# Altium PCB RCSS_B2B V3.0 20130320.PcbDoc (part 2 of 2)
Units mm, origin at the board's own origin, x right, y up, seen from the top; angles counter-clockwise.
Board outline 142.1 x 102.2 mm, 4 copper layers (Top Layer, Mid-Layer 1, Mid-Layer 2, Bottom Layer); 252 components, 153 nets, 735 pads, 222 vias.
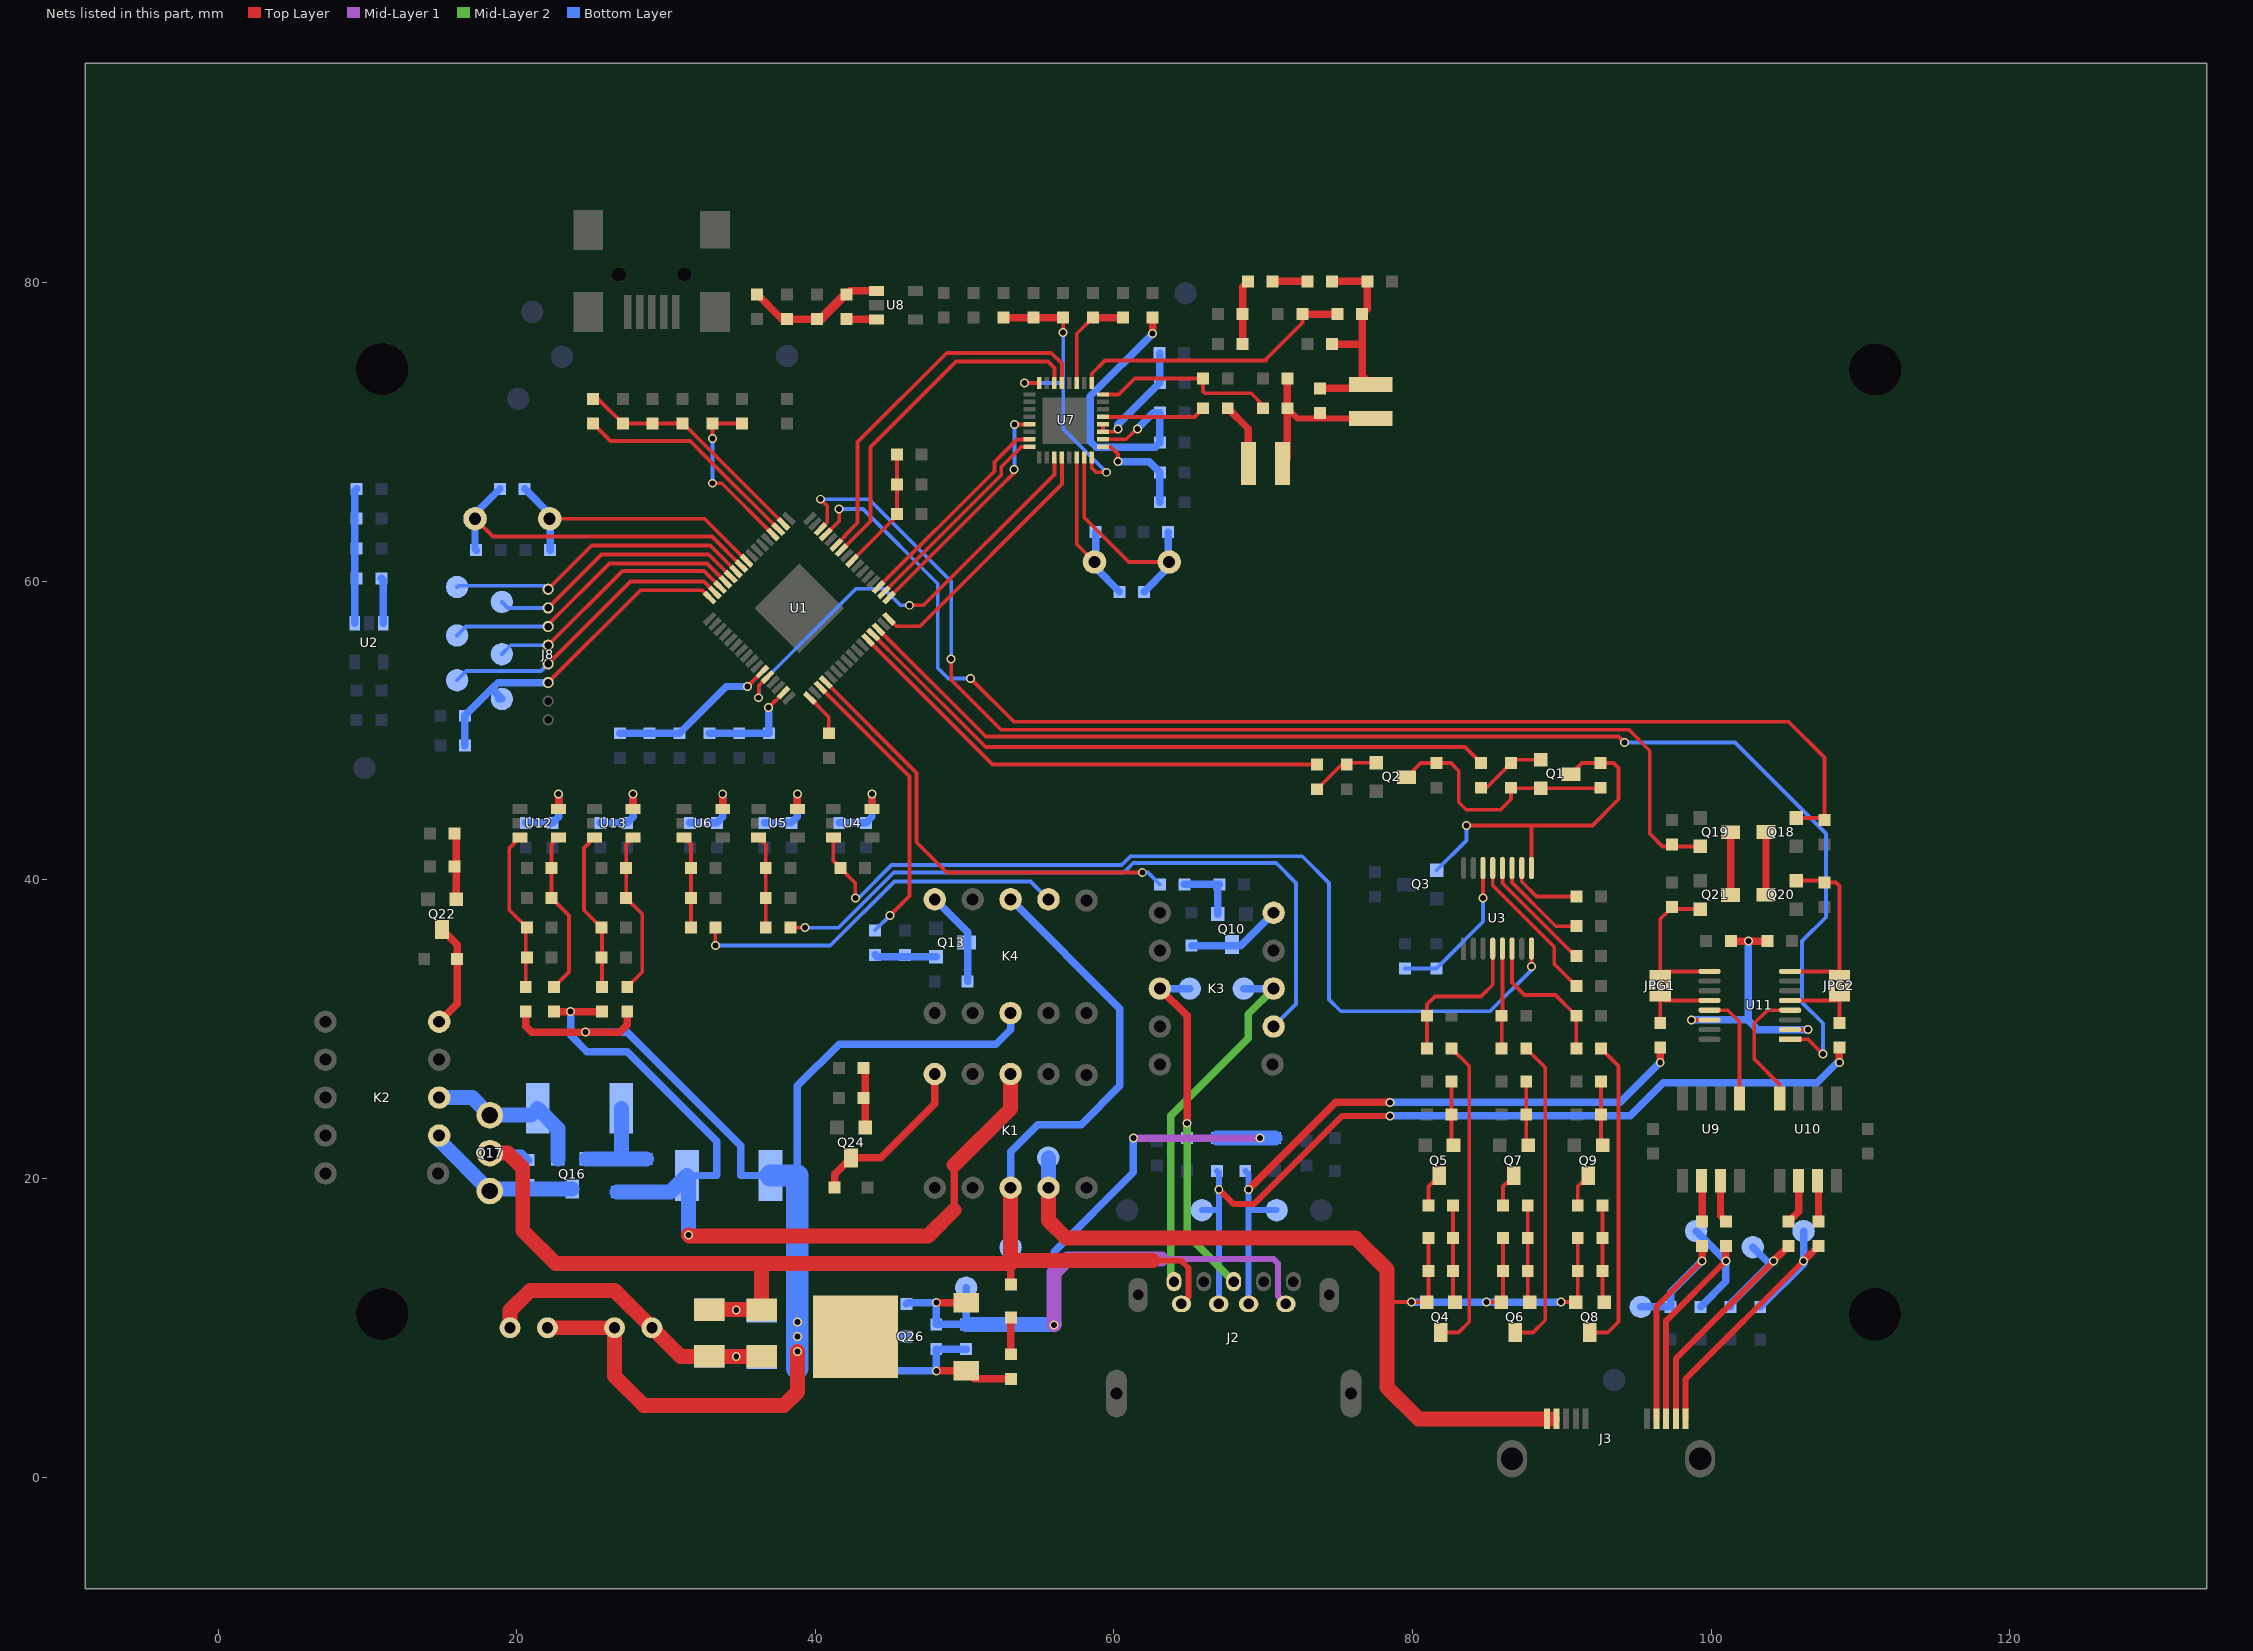
[diagram p4: the nets of this part, all layers, seen from the top]

## Via types
v1: diameter 0.6, hole 0.4, Top Layer to Bottom Layer, tented both sides, 221 vias
v2: diameter 0.8, hole 0.5, Top Layer to Bottom Layer, tented both sides, 1 vias

## Nets (pads, with @x,y where several pads share a name; then routed paths per layer and width w, separated by ;. In a path a pad name is that pad's centre, name@x,y a point inside that pad or via, vN(x,y) a via of type N, cw(c..) or ccw(c..) an arc to the next point about the centre after c; other vN are vias at no path point) (continued)
IRQ: U1.43 U7.13 | length 26.2
  Top Layer w0.254: U1.43@41.402,62.443 41.98,63.02 41.98,63.081 42.83,63.931 42.83,67.3 ; 42.83,66.3 42.83,67.3 ; U7.13@56.513,73.29 56.513,74.587 55.8,75.3 48.8,75.3 42.83,69.33 42.83,67.3
"LEV 1": R20.1 U1.28 | length 33.5
  Top Layer w0.254: U1.28@43.524,56.079 51.877,47.725 R20.1@73.6,47.725
"LEV 2": R17.1 U1.29 | length 46
  Top Layer w0.254: U1.29@43.877,56.432 45.555,54.755 ; 44.331,55.978 45.555,54.755 ; R17.1@84.6,47.825 83.525,48.9 51.41,48.9 45.555,54.755
MISO: U1.35 U7.23 | length 14.6
  Top Layer w0.254: U1.35@44.231,59.614 52,67.383 52,68 53.5,69.5 54.316,69.5 U7.23@54.335,69.519
MOD: U1.42 U7.14 | length 23.6
  Top Layer w0.254: U1.42@41.756,62.089 43.7,64.033 43.7,69 49.425,74.725 54.7,74.725 55.575,74.725 56.013,74.287 U7.14@56.013,73.29
MOSI: U1.34 U7.24 | length 14.1
  Top Layer w0.254: U1.34@44.584,59.261 51.945,66.621 ; 51.945,66.629 51.945,66.621 ; U7.24@54.335,69.019 53.819,69.019 52.457,67.657 52.457,67.133 51.945,66.621
NetC2_1: C2.1 R2.1 U1.52 | length 11.5
  Top Layer w0.254: v1(33.1,66.575) 33.735,66.575 U1.52@37.16,63.15 ; v1(33.1,69.575) R2.1@33.1,70.575 C2.1@35.1,70.575
  Bottom Layer w0.254: v1(33.1,66.575) v1(33.1,69.575)
NetC3_1: C3.1 R3.2 R4.1 R5.1 U1.50 | length 16.2
  Top Layer w0.254: R5.1@25.1,72.225 25.45,72.225 R4.1@27.1,70.575 C3.1@29.1,70.575 R3.2@31.1,70.575 31.149,70.575 U1.50@37.867,63.857
NetC5_2: C5.2 R52.1 R126.1 U12.4 | length 11.1
  Top Layer w0.254: R52.1@22.5,32.825 23.5,33.825 23.5,37.625 R126.1@22.325,38.8 C5.2@22.325,40.8 22.325,42.375 U12.4@22.795,42.845
NetC7_2: C7.2 R7.2 U1.57 XT1.1 | length 19.2
  Top Layer w0.254: XT1.1@22.2,64.2 32.574,64.2 U1.57@35.392,61.382
  Bottom Layer w0.5: R7.2@20.525,66.2 22.225,64.5 C7.2@22.225,62.1
NetC8_1: C8.1 R7.1 U1.58 XT1.2 | length 24
  Top Layer w0.254: XT1.2@17.2,64.2 18.4,63 30.067,63 33.067,63 U1.58@35.038,61.028
  Bottom Layer w0.5: C8.1@17.275,62.1 17.2,62.175 XT1.2@17.2,64.2 17.2,64.525 R7.1@18.875,66.2
NetC9_2: C9.2 C10.2 R8.2 R9.2 U2.1 | length 9.8
  Bottom Layer w0.5: U2.1@9.145,57.195 9.145,58.9 ; 9.145,58.195 9.145,58.9 ; R8.2@9.275,66.2 9.145,66.07 9.145,64.2 9.145,58.9
NetC13_1: C13.1 C16.1 R11.1 U1.11 | length 11.3
  Top Layer w0.254: v1(35.453,52.957) U1.11@36.453,53.957
  Bottom Layer w0.5: R11.1@26.9,49.825 C13.1@30.9,49.825 34.032,52.957 v1(35.453,52.957)
NetC14_1: C14.1 C15.1 R10.2 U1.15 | length 7.1
  Top Layer w0.254: v1(36.867,51.543) U1.15@37.867,52.543
  Bottom Layer w0.5: R10.2@32.9,49.825 C14.1@36.834,49.825 ; v1(36.867,51.543) 36.867,49.858 C14.1@36.9,49.825
NetC17_2: C17.2 U1.17 | length 2.9
  Top Layer w0.254: U1.17@39.635,52.19 40.9,50.924 C17.2@40.9,49.825
NetC18_1: C18.1 C19.1 R12.2 U1.40 | length 8.4
  Top Layer w0.254: U1.40@42.463,61.382 45.475,64.394 C18.1@45.475,64.5 C19.1@45.475,66.5 R12.2@45.475,68.5
NetC20_2: C20.2 R13.2 U3.14 | length 10.1
  Top Layer w0.254: v1(84.725,38.8) U3.14@84.725,40.8
  Bottom Layer w0.254: R13.2@79.5,34.075 C20.2@81.6,34.075 84.725,37.2 v1(84.725,38.8)
NetC21_2: C21.2 R122.1 R123.1 U13.4 | length 11.1
  Top Layer w0.254: R122.1@27.4,32.825 28.4,33.825 28.4,37.725 R123.1@27.325,38.8 27.325,42.375 U13.4@27.795,42.845
NetC22_1: C22.1 R72.2 U13.5 | length 4.9
  Top Layer w0.5: U13.5@27.795,44.755 v1(27.795,45.755)
  Bottom Layer w0.5: R72.2@25.6,43.825 C22.1@27.4,43.825 27.795,44.22 v1(27.795,45.755)
NetC23_1: C23.1 R120.1 R121.1 U13.3 | length 10.8
  Top Layer w0.254: U13.3@25.205,42.845 24.5,42.14 24.5,37.975 R120.1@25.675,36.8 25.7,36.775 R121.1@25.7,32.825
NetC24_2: C24.2 Q4.1 R27.1 R28.1 | length 6.5
  Top Layer w0.254: R28.1@82.725,18.2 C24.2@82.725,16 R27.1@82.725,13.8 82.725,11.843 Q4.1@82.852,11.716
NetC25_2: C25.2 Q6.1 R33.1 R34.1 | length 6.5
  Top Layer w0.254: R34.1@87.725,18.2 C25.2@87.725,16 R33.1@87.725,13.8 87.725,11.843 Q6.1@87.853,11.716
NetC26_2: C26.2 Q8.1 R39.1 R40.1 | length 6.5
  Top Layer w0.254: R40.1@92.725,18.2 C26.2@92.725,16 R39.1@92.725,13.8 92.725,11.843 Q8.1@92.853,11.716
NetC27_1: C27.1 R43.1 U4.5 | length 4.9
  Top Layer w0.5: U4.5@43.795,44.755 v1(43.795,45.755)
  Bottom Layer w0.5: R43.1@41.6,43.825 C27.1@43.4,43.825 43.795,44.22 v1(43.795,45.755)
NetC28_1: C28.1 U3.8 U4.3 | length 62.6
  Top Layer w0.254: U4.3@41.205,42.845 41.205,41.27 C28.1@41.675,40.8 42.675,39.8 v1(42.675,38.8) ; v1(87.975,34.2) U3.8@87.975,35.4
  Bottom Layer w0.254: v1(42.675,38.8) 42.907,38.8 45.107,41 60.523,41 61.111,41.587 71.2,41.587 72.613,41.587 74.4,39.8 74.4,32 75.2,31.2 85.2,31.2 87.975,33.975 v1(87.975,34.2)
NetC31_1: C31.1 R50.2 U5.5 | length 4.9
  Top Layer w0.5: U5.5@38.795,44.755 v1(38.795,45.755)
  Bottom Layer w0.5: R50.2@36.6,43.825 C31.1@38.4,43.825 38.795,44.22 v1(38.795,45.755)
NetC32_1: C32.1 R48.2 R49.2 U5.3 | length 6.2
  Top Layer w0.254: U5.3@36.205,42.845 36.675,42.375 R49.2@36.675,38.8 R48.2@36.675,36.8
NetC34_1: C34.1 R59.2 U6.5 | length 4.9
  Top Layer w0.5: U6.5@33.795,44.755 v1(33.795,45.755)
  Bottom Layer w0.5: R59.2@31.6,43.825 C34.1@33.4,43.825 33.795,44.22 v1(33.795,45.755)
NetC35_1: C35.1 R57.2 R58.2 U6.3 | length 6.2
  Top Layer w0.254: U6.3@31.205,42.845 31.675,42.375 R58.2@31.675,38.8 R57.2@31.675,36.8
NetC38_2: C38.2 R82.2 U7.31 XT2.1 | length 15.6
  Top Layer w0.254: U7.31@58.013,68.31 58.013,64.287 61,61.3 XT2.1@63.7,61.3
  Bottom Layer w0.5: R82.2@62.025,59.3 63.625,60.9 C38.2@63.625,63.3
NetC39_1: C39.1 R82.1 U7.30 XT2.2 | length 12.2
  Top Layer w0.254: U7.30@57.513,68.31 57.513,62.487 XT2.2@58.7,61.3
  Bottom Layer w0.5: C39.1@58.775,63.3 58.775,60.9 R82.1@60.375,59.3
NetC40_1: C40.1 C41.1 U7.3 U7.4 | length 7.5
  Top Layer w0.254: U7.4@59.265,70.519 U7.3@59.265,70.019 v1@60.065,70.019
  Bottom Layer w0.5: v1(60.265,70.219) 60.265,70.49 C41.1@63.075,73.3 C40.1@63.075,75.275
NetC42_1: C42.1 C43.1 R80.2 U7.2 | length 21.5
  Top Layer w0.254: U7.2@59.265,69.519 60.826,69.519 61.526,70.219 v1(61.565,70.219)
  Top Layer w0.5: v1(62.6,76.6) R80.2@62.6,77.675
  Bottom Layer w0.5: v1(61.565,70.219) 62.646,71.3 C42.1@63.075,71.3 C43.1@63.075,69.3 62.775,69 58.8,69 58.4,69.4 58.4,72.4 v1(62.6,76.6)
NetC44_1: C44.1 C45.1 U7.1 | length 6.8
  Top Layer w0.254: U7.1@59.265,69.019 59.781,69.019 60.265,68.535 v1(60.265,68.019)
  Bottom Layer w0.5: v1(60.265,68.019) 62.356,68.019 C44.1@63.075,67.3 C45.1@63.075,65.3
NetC48_2: C48.2 C49.2 U7.11 | length 6.8
  Top Layer w0.254: U7.11@57.513,73.29 57.513,76.588 C49.2@58.6,77.675
  Top Layer w0.5: C49.2@58.6,77.675 C48.2@60.6,77.675
NetC50_1: C50.1 L1.2 | length 4.3
  Top Layer w0.5: C50.1@67.625,71.6 69.015,70.21 L1.2@69.015,67.9
NetC50_2: C50.2 U7.5 | length 7
  Top Layer w0.254: U7.5@59.265,71.019 65.394,71.019 C50.2@65.975,71.6
NetC51_1: C51.1 C53.1 C54.2 L1.1 L2.2 | length 11.7
  Top Layer w0.4: C51.1@71.625,71.6 72.285,70.94 ; 72.285,70.915 L2.2@77.2,70.915
  Top Layer w0.5: L1.1@71.3,67.9 71.625,68.225 C51.1@71.625,71.6 C53.1@71.625,73.6
NetC51_2: C51.2 C52.1 U7.8 | length 12.6
  Top Layer w0.254: U7.8@59.265,72.519 60.319,72.519 61.4,73.6 C52.1@65.975,73.6 65.975,72.725 66.1,72.6 69.2,72.6 69.975,71.825 C51.2@69.975,71.6
NetC54_1: C54.1 C55.1 C56.1 L2.1 R84.2 R85.1 | length 15
  Top Layer w0.5: C54.1@73.8,72.925 76.925,72.925 L2.1@77.2,73.2 76.625,73.775 C56.1@76.625,77.9 76.975,78.25 R85.1@76.975,80.1 R84.2@74.625,80.1 ; C55.1@74.625,75.9 76.525,75.9
NetC56_2: C56.2 C57.1 U7.9 | length 19.1
  Top Layer w0.254: U7.9@58.513,73.29 58.513,73.913 59.4,74.8 70.2,74.8 70.2,74.9 72.625,77.325 C57.1@72.625,77.9
  Top Layer w0.5: C57.1@72.625,77.9 C56.2@74.975,77.9
NetC58_1: C58.1 C59.1 R83.2 | length 4.3
  Top Layer w0.5: R83.2@68.625,75.9 C59.1@68.625,77.9 68.625,79.75 C58.1@68.975,80.1
NetC58_2: C58.2 R84.1 | length 2.3
  Top Layer w0.5: C58.2@70.625,80.1 R84.1@72.975,80.1
NetC60_2: C60.2 C61.2 R86.2 R87.2 U8.1 | length 16.3
  Top Layer w0.254: C60.2@38.1,77.575 C61.2@40.1,77.575 41.98,79.455 U8.1@44.105,79.455
  Top Layer w0.5: R86.2@36.1,79.225 37.75,77.575 C60.2@38.1,77.575 40.45,77.575 42.33,79.455 U8.1@44.105,79.455
NetC66_2: C66.2 R92.1 U11.2 U11.14 | length 18.2
  Top Layer w0.254: v1(98.7,30.625) U11.14@99.9,30.625 ; U11.2@105.3,29.975 v1(106.5,29.975)
  Top Layer w0.5: C66.2@101.325,35.9 v1(102.5,35.9) R92.1@103.775,35.9
  Bottom Layer w0.5: v1(98.7,30.625) 102.475,30.625 102.5,30.6 ; v1(102.5,35.9) 102.5,30.6 ; v1(106.5,29.975) 103.125,29.975 102.5,30.6
NetC67_2: C67.2 D3.1 Q26.1 R93.1 R94.1 | length 12.8
  Top Layer w0.5: v1(48.1,7.115) Q26.1@50.1,7.115 50.64,6.575 R93.1@53.1,6.575
  Bottom Layer w0.5: D3.1@44.1,7.3 44.285,7.115 v1(48.1,7.115) R94.1@48.1,8.575 C67.2@50.1,8.575
NetC69_1: C69.1 R70.2 U12.5 | length 4.9
  Top Layer w0.5: U12.5@22.795,44.755 v1(22.795,45.755)
  Bottom Layer w0.5: R70.2@20.6,43.825 C69.1@22.4,43.825 22.795,44.22 v1(22.795,45.755)
NetC70_1: C70.1 R61.1 R113.1 U12.3 | length 10.8
  Top Layer w0.254: U12.3@20.205,42.845 19.5,42.14 19.5,37.975 R61.1@20.675,36.8 20.6,36.725 R113.1@20.6,32.825
NetD1_1: D1.1 D2.2 R95.2 R96.2 R97.2 R98.2 | length 23.9
  Top Layer w1: D1.1@19.55,10 19.55,11.15 20.9,12.5 26.55,12.5 D2.2@29.05,10 30.965,8.085 R98.2@32.9,8.085 R96.2@36.4,8.085
  Bottom Layer w1: R97.2@32.9,8.085 36.3,8.085 R95.2@36.4,7.985
  other v1: 34.7,8.085
NetD3_2: D3.2 D4.2 | length 2
  Bottom Layer w0.5: D3.2@44.1,9.5 46,9.5 D4.2@46.1,9.4
NetD5_1: D5.1 R93.2 | length 2.5
  Top Layer w0.5: R93.2@53.1,8.225 D5.1@53.1,10.7
NetD6_1: D6.1 D7.1 K1.3 R52.2 R121.2 R125.1 | length 60.1
  Top Layer w0.5: R52.2@22.5,31.175 v1(23.6,31.175) R121.2@25.7,31.175 ; 49.3,17.9 49.3,20.9
  Top Layer w1: v1(31.5,16.2) 31.553,16.147 47.547,16.147 49.3,17.9 ; 49.3,20.9 53.08,24.68 K1.3@53.08,27
  Bottom Layer w0.5: v1(23.6,31.175) 23.6,29.6 24.7,28.5 27.4,28.5 33.4,22.5 33.4,20.2 R125.1@31.4,20.2
  Bottom Layer w1: D7.1@26.7,19.1 D6.1@28.7,19.1 30.3,19.1 R125.1@31.4,20.2 ; v1(31.5,16.2) R125.1@31.5,20.1
NetD6_2: D6.2 D7.2 Q16.2 R62.2 | length 7.6
  Bottom Layer w1: Q16.2@24.652,21.316 D7.2@26.716,21.316 ; D7.2@26.7,21.3 D7.2@26.716,21.316 ; R62.2@27,24.7 27,21.6 D7.2@26.716,21.316 ; D6.2@28.7,21.3 28.684,21.316 D7.2@26.716,21.316
NetD8_2: D8.2 K1.1 Q24.3 | length 11.6
  Top Layer w0.5: D8.2@41.287,19.384 41.287,20.284 Q24.3@42.387,21.384 44.384,21.384 48,25 K1.1@48,27
NetD17_2: D17.2 K3.1 Q10.3 | length 6.4
  Bottom Layer w0.5: D17.2@65.2,35.6 68.5,35.6 K3.1@70.7,37.8
NetD18_2: D18.2 K4.1 Q13.3 | length 6.4
  Bottom Layer w0.5: K4.1@48,38.7 50.2,36.5 D18.2@50.2,33.2
NetD19_2: D19.2 K2.1 Q22.3 | length 7.1
  Top Layer w0.5: K2.1@14.8,30.5 16,31.7 D19.2@16,34.7 16,35.671 Q22.3@14.987,36.684
NetJPG1_2: JPG1.2 R105.2 U11.12 | length 5.2
  Top Layer w0.254: R105.2@96.6,30.425 JPG1.2@96.6,32.195 96.87,31.925 U11.12@99.9,31.925
NetJPG2_1: JPG2.1 R106.2 U11.5 | length 5.2
  Top Layer w0.254: U11.5@105.3,31.925 108.33,31.925 JPG2.1@108.6,32.195 R106.2@108.6,30.425
NetK2_3: K2.3 Q16.1 Q17.2 R62.1 | length 10.6
  Bottom Layer w1: K2.3@14.8,25.42 17.017,25.42 Q17.2@18.197,24.24 R62.1@20.94,24.24 ; R62.1@21.4,24.7 22.747,23.353 Q16.1@22.747,21.316
NetK2_4: K2.4 Q16.3 Q17.1 R63.2 | length 10.7
  Bottom Layer w1: K2.4@14.8,22.88 14.8,22.558 Q17.1@18.198,19.16 18.322,19.284 Q16.3@23.713,19.284
NetK3_4: K3.4 R48.1 | length 46.5
  Top Layer w0.254: R48.1@38.325,36.8 v1(39.3,36.8)
  Bottom Layer w0.254: v1(39.3,36.8) 41.553,36.8 45.253,40.5 60.67,40.5 61.3,41.13 70.87,41.13 72.2,39.8 72.2,31.68 K3.4@70.7,30.18
NetK4_4: K4.4 R57.1 | length 25.8
  Top Layer w0.254: v1(33.3,35.6) R57.1@33.3,36.775
  Bottom Layer w0.254: v1(33.3,35.6) 41,35.6 45.3,39.9 54.42,39.9 K4.4@55.62,38.7
NetQ1_1: Q1.1 R17.2 R18.2 | length 4.8
  Top Layer w0.254: R17.2@84.6,46.175 84.95,46.175 86.827,48.053 Q1.1@88.584,48.053
NetQ1_2: Q1.2 Q2.3 R18.1 R19.2 R22.1 | length 16.9
  Top Layer w0.254: Q2.3@79.616,46.887 80.554,47.825 R22.1@81.6,47.825 82.575,47.825 83.1,47.3 83.1,45.2 83.6,44.7 85.9,44.7 86.6,45.4 R18.1@86.6,46.175 ; R18.1@86.627,46.148 Q1.2@88.584,46.148 92.573,46.148 R19.2@92.6,46.175
NetQ1_3: Q1.3 Q3.1 R19.1 U3.9 | length 23.2
  Top Layer w0.254: v1(83.616,43.653) 92.053,43.653 93.8,45.4 93.8,47.5 93.475,47.825 R19.1@92.6,47.825 91.354,47.825 Q1.3@90.616,47.087 ; U3.9@87.975,40.8 87.975,43.577
  Bottom Layer w0.254: Q3.1@81.616,40.652 83.616,42.653 v1(83.616,43.653)
NetQ2_1: Q2.1 R20.2 R21.2 | length 4.7
  Top Layer w0.254: R20.2@73.6,46.075 75.378,47.853 Q2.1@77.584,47.853
NetQ4_3: Q4.3 R26.1 | length 21
  Top Layer w0.254: Q4.3@81.887,9.684 83.084,9.684 83.8,10.4 83.8,27.525 R26.1@82.625,28.7
NetQ5_1: Q5.1 R29.2 R30.2 | length 4.3
  Top Layer w0.254: R29.2@82.625,26.5 R30.2@82.625,24.3 82.625,22.343 Q5.1@82.752,22.216
NetQ5_3: Q5.3 R28.2 | length 2.3
  Top Layer w0.254: R28.2@81.075,18.2 81.075,19.472 Q5.3@81.787,20.184
NetQ6_3: Q6.3 R32.1 | length 21.1
  Top Layer w0.254: Q6.3@86.887,9.684 88.084,9.684 88.9,10.5 88.9,27.425 R32.1@87.625,28.7
NetQ7_1: Q7.1 R35.2 R36.2 | length 4.3
  Top Layer w0.254: R35.2@87.625,26.5 R36.2@87.625,24.3 87.625,22.343 Q7.1@87.752,22.216
NetQ7_3: Q7.3 R34.2 | length 2.3
  Top Layer w0.254: R34.2@86.075,18.2 86.075,19.472 Q7.3@86.787,20.184
NetQ8_3: Q8.3 R38.1 | length 21
  Top Layer w0.254: Q8.3@91.887,9.684 93.084,9.684 93.8,10.4 93.8,27.525 R38.1@92.625,28.7
NetQ9_1: Q9.1 R41.2 R42.2 | length 4.3
  Top Layer w0.254: R41.2@92.625,26.5 92.625,22.343 Q9.1@92.753,22.216
NetQ9_3: Q9.3 R40.2 | length 2.3
  Top Layer w0.254: R40.2@91.075,18.2 91.075,19.472 Q9.3@91.787,20.184
NetQ10_1: Q10.1 R44.2 R45.1 | length 4.4
  Bottom Layer w0.5: R44.2@64.725,39.7 R45.1@67.075,39.7 66.947,39.573 Q10.1@66.947,37.716
NetQ13_1: Q13.1 R53.2 R54.1 | length 4.1
  Bottom Layer w0.5: R53.2@44,34.975 44.127,34.847 Q13.1@48.084,34.847
NetQ18_3: Q18.3 Q20.3 | length 4.2
  Top Layer w0.5: Q20.3@103.684,39.013 Q18.3@103.684,43.213
NetQ19_3: Q19.3 Q21.3 | length 4.2
  Top Layer w0.5: Q21.3@101.316,38.987 Q19.3@101.316,43.187
NetQ22_1: Q22.1 R103.1 R104.2 | length 4.4
  Top Layer w0.5: R103.1@15.825,43.1 15.953,42.973 Q22.1@15.953,38.716
NetQ24_1: Q24.1 R73.1 R74.2 | length 4
  Top Layer w0.5: R73.1@43.225,27.4 43.353,27.273 Q24.1@43.353,23.416
NetR9_1: R9.1 U2.3 | length 3.1
  Bottom Layer w0.5: R9.1@10.925,60.2 11.055,60.07 U2.3@11.055,57.195
NetR14_1: R14.1 U3.13 | length 10.2
  Top Layer w0.254: U3.13@85.375,40.8 85.375,39.625 89.5,35.5 89.5,34.375 R14.1@90.975,32.9
NetR15_1: R15.1 U3.12 | length 8
  Top Layer w0.254: U3.12@86.025,40.8 86.025,39.775 90.9,34.9 R15.1@90.975,34.9
NetR16_1: R16.1 U3.11 | length 6.5
  Top Layer w0.254: U3.11@86.675,40.8 86.675,39.825 89.6,36.9 R16.1@90.975,36.9
NetR23_1: R23.1 U3.10 | length 5
  Top Layer w0.254: U3.10@87.325,40.8 87.325,39.875 88.3,38.9 R23.1@90.975,38.9
NetR25_2: R25.2 R26.2 U3.4 | length 10.3
  Top Layer w0.254: R26.2@80.975,28.7 R25.2@80.975,30.9 80.975,31.675 81.5,32.2 84.6,32.2 85.375,32.975 U3.4@85.375,35.4
NetR31_2: R31.2 R32.2 U3.5 | length 6.7
  Top Layer w0.254: R32.2@85.975,28.7 R31.2@85.975,30.9 86.025,30.95 U3.5@86.025,35.4
NetR37_2: R37.2 R38.2 U3.6 | length 9.7
  Top Layer w0.254: U3.6@86.675,35.4 86.675,33.125 87.5,32.3 89.575,32.3 R37.2@90.975,30.9 R38.2@90.975,28.7
NetR87_1: R87.1 U8.3 | length 2
  Top Layer w0.5: R87.1@42.1,77.575 U8.3@44.075,77.575
NetR88_1: R88.1 U9.6 | length 2.7
  Top Layer w0.5: U9.6@99.365,19.85 99.4,19.815 R88.1@99.4,17.125
NetR89_1: R89.1 U9.7 | length 2.9
  Top Layer w0.5: U9.7@100.635,19.85 100.635,17.49 R89.1@101,17.125
NetR90_1: R90.1 U10.6 | length 3
  Top Layer w0.5: R90.1@105.2,17.125 105.865,17.79 U10.6@105.865,19.85
NetR91_1: R91.1 U10.7 | length 2.8
  Top Layer w0.5: U10.7@107.135,19.85 107.2,19.785 R91.1@107.2,17.125
NetU1_12: U1.12 U7.27 | length 30.2
  Top Layer w0.254: v1(36.206,52.204) 36.206,53.004 U1.12@36.806,53.604 ; v1(46.3,58.4) 47.247,58.4 56.013,67.167 U7.27@56.013,68.31
  Bottom Layer w0.254: v1(36.206,52.204) 36.206,53.004 42.702,59.5 44.6,59.5 45.7,58.4 v1(46.3,58.4)
NetU9_1: U9.1 U11.13 | length 7.5
  Top Layer w0.254: U11.13@99.9,31.275 101.125,31.275 101.905,30.495 U9.1@101.905,25.35
NetU10_4: U10.4 U11.4 | length 8.5
  Top Layer w0.254: U10.4@104.595,25.35 104.595,26.305 102.9,28 102.9,30.4 103.775,31.275 U11.4@105.3,31.275
"NFC EN": U1.32 U7.28 | length 17.5
  Top Layer w0.254: U1.32@44.938,57.493 45.431,57 47,57 56.513,66.513 U7.28@56.513,68.31
"PACK C+": J2.9 K3.3 TP26.1 | length 24.6
  Mid-Layer 2 w0.5: J2.9@64.025,13.095 63.8,13.32 63.8,24.2 69,29.4 69,31.02 K3.3@70.7,32.72
  Bottom Layer w0.5: TP26.1@68.7,32.72 K3.3@70.7,32.72
"PACK C-": D12.2 J2.7 K3.8 TP27.1 | length 24.7
  Top Layer w0.5: K3.8@63.08,32.72 64.9,30.9 v1(64.9,23.7)
  Mid-Layer 2 w0.5: v1(64.9,23.7) 64.9,16.22 J2.7@68.025,13.095
  Bottom Layer w0.5: K3.8@63.08,32.72 TP27.1@65.08,32.72 ; D12.2@64.9,22.7 v1(64.9,23.7)
"PACK D+": D5.2 J2.1 K1.8 K4.3 Q17.3 R63.1 R95.1 R96.1 R97.1 R98.1 TP17.1 | length 106.2
  Top Layer w0.4: 62.6,14.5 64.5,14.5 65,14 65,12.07 J2.1@64.525,11.595
  Top Layer w0.5: 53.08,14.3 53.1,14.28 D5.2@53.1,12.9
  Top Layer w1: Q17.3@18.197,21.7 19.4,21.7 20.4,20.7 20.4,16.5 22.6,14.3 29.2,14.3 ; 29.815,14.3 29.2,14.3 ; R98.1@32.9,11.215 R96.1@36.4,11.215 36.4,14.2 ; K1.8@53.08,19.38 53.08,14.3 ; 62.6,14.5 53.28,14.5 53.08,14.3 ; 29.2,14.3 53.08,14.3
  Bottom Layer w0.5: Q17.3@18.197,21.7 20.325,21.7 R63.1@20.8,21.225 ; K1.8@53.08,19.38 53.08,21.78 54.9,23.6 57.8,23.6 60.4,26.2 60.4,31.38 K4.3@53.08,38.7
  Bottom Layer w1: R97.1@32.9,11.215 36.3,11.215 R95.1@36.4,11.115 ; TP17.1@53.08,15.38 K1.8@53.08,19.38
  other v1: 34.7,11.2
"PACK D-": D1.2 D2.1 K4.8 Q26.3 R113.2 R122.2 R125.2 | length 89.1
  Top Layer w0.5: R113.2@20.6,31.175 20.6,30.2 21,29.8 v1(24.6,29.8) 26.9,29.8 27.4,30.3 R122.2@27.4,31.175
  Top Layer w1: D1.2@22.05,10 D2.1@26.55,10 26.55,6.75 28.5,4.8 37.9,4.8 38.8,5.7 v1(38.8,8.4)
  Top Layer w1.5: Q26.3@41.7,9.4 Q26.3@42.7,9.4
  Bottom Layer w0.5: v1(24.6,29.8) 27.4,29.8 35,22.2 35,20.2 R125.2@37,20.2 ; 38.8,20.2 38.8,26.2 41.6,29 52.1,29 53.08,29.98 K4.8@53.08,31.08
  Bottom Layer w1.5: R125.2@37,20.2 38.8,20.2 v1(38.8,9.4) 38.8,7.3
  other v1: 38.8,10.4
"PACK D- IN": C67.1 D4.1 D9.2 D10.2 D11.2 J2.4 Q26.2 R94.2 TP18.1 | length 64.8
  Top Layer w0.5: v1(48.1,11.685) Q26.2@50.1,11.685
  Mid-Layer 1 w0.4: 63.2,14.6 70.7,14.6 71,14.3 71,12.12 J2.4@71.525,11.595
  Mid-Layer 1 w0.5: v1(61.3,22.7) v1(69.8,22.7)
  Mid-Layer 1 w1: v1(56,10.2) 56,13.7 56.9,14.6 63.2,14.6
  Bottom Layer w0.5: D4.1@46.1,11.6 46.185,11.685 v1(48.1,11.685) R94.2@48.1,10.225 C67.1@50.1,10.225 TP18.1@50.1,12.685 ; v1(56,10.2) 56,15.1 61.3,20.4 v1(61.3,22.7)
  Bottom Layer w1: C67.1@50.1,10.225 v1@55.975,10.225 ; D9.2@66.9,22.7 D10.2@68.8,22.7 v1(69.8,22.7) D11.2@70.8,22.7
PUR: R5.2 U1.51 | length 15.3
  Top Layer w0.254: R5.2@25.1,70.575 26.275,69.4 31.617,69.4 32.708,68.308 U1.51@37.513,63.503
RST: C6.2 J8.6 R6.2 TP10.1 U1.64 | length 23.3
  Top Layer w0.254: J8.6@22.1,53.225 28.275,59.4 32.424,59.4 U1.64@32.917,58.907
  Bottom Layer w0.5: R6.2@16.525,49 C6.2@16.525,51 18.363,52.837 ; TP10.1@18.787,52.125 TP10.1@19,52.125 18.363,52.762 18.363,52.837 ; J8.6@22.1,53.225 18.75,53.225 18.363,52.837
RX: Q19.2 R67.2 U1.46 | length 78.1
  Top Layer w0.254: U1.46@40.342,63.503 40.8,63.962 40.8,65.045 v1(40.342,65.503) ; v1(49.1,54.8) 49.1,53.4 52.443,50.057 94.5,50.057 95.9,48.657 95.9,43.1 96.752,42.248 Q19.2@99.284,42.248
  Bottom Layer w0.254: v1(40.342,65.503) 43.597,65.503 49.1,60 v1(49.1,54.8)
RX1: D10.1 J2.3 R105.1 TP20.1 | length 42.9
  Top Layer w0.5: v1(69.025,19.275) 74.85,25.1 v1(78.5,25.1) ; v1(96.6,27.775) R105.1@96.6,28.775
  Bottom Layer w0.4: D10.1@68.8,20.5 69.025,20.275 v1(69.025,19.275) J2.3@69.025,11.595 ; 69.05,17.875 TP20.1@70.9,17.875
  Bottom Layer w0.5: v1(78.5,25.1) 93.925,25.1 v1(96.6,27.775)
RX+: D14.1 J3.7 R88.2 TP13.1 | length 18.8
  Top Layer w0.4: J3.7@96.35,3.9 96.35,11.425 v1(99.4,14.475)
  Top Layer w0.5: v1(99.4,14.475) R88.2@99.4,15.475
  Bottom Layer w0.5: TP13.1@95.3,11.4 D14.1@97.3,11.4 97.3,12.375 v1(99.4,14.475)
RX-: D13.1 J3.8 R89.2 TP15.1 | length 19.8
  Top Layer w0.4: J3.8@97,3.9 97,10.475 v1(101,14.475)
  Top Layer w0.5: v1(101,14.475) R89.2@101,15.475
  Bottom Layer w0.5: TP15.1@99,16.475 v1(101,14.475) 101,13.1 D13.1@99.3,11.4
RXD: JPG1.1 Q21.2 R71.2 U11.9 | length 10.3
  Top Layer w0.254: Q21.2@99.284,38.048 97.527,38.048 R71.2@97.4,38.175 96.6,37.375 JPG1.1@96.6,33.605 96.87,33.875 U11.9@99.9,33.875
SS: U1.33 U7.21 | length 16.4
  Top Layer w0.254: U1.33@44.938,58.907 52.315,66.284 ; 52.531,66.5 52.315,66.284 ; v1(53.3,67.5) 53.3,67.269 52.315,66.284 ; v1(53.335,70.519) U7.21@54.335,70.519
  Bottom Layer w0.254: v1(53.3,67.5) 53.335,67.535 v1(53.335,70.519)
TCK: J8.5 TP9.1 U1.63 | length 20.3
  Top Layer w0.254: J8.5@22.1,54.475 27.625,60 32.531,60 U1.63@33.271,59.261
  Bottom Layer w0.254: TP9.1@16,53.375 16.625,54 21.625,54 J8.5@22.1,54.475
TDI: J8.3 TP7.1 U1.61 | length 20.6
  Top Layer w0.254: J8.3@22.1,56.975 22.1,57.1 26.2,61.2 32.746,61.2 U1.61@33.978,59.968
  Bottom Layer w0.254: TP7.1@16,56.375 16.6,56.975 J8.3@22.1,56.975
TDO: J8.2 TP6.1 U1.60 | length 17.6
  Top Layer w0.254: J8.2@22.1,58.225 25.675,61.8 32.853,61.8 U1.60@34.331,60.321
  Bottom Layer w0.254: TP6.1@19,58.625 19.4,58.225 J8.2@22.1,58.225
TEST: J8.1 TP5.1 U1.59 | length 20.7
  Top Layer w0.254: J8.1@22.1,59.475 25.025,62.4 32.96,62.4 U1.59@34.685,60.675
  Bottom Layer w0.254: TP5.1@16,59.625 16.08,59.705 21.87,59.705 J8.1@22.1,59.475
TMS: J8.4 TP8.1 U1.62 | length 17.4
  Top Layer w0.254: J8.4@22.1,55.725 27.075,60.7 32.538,60.7 U1.62@33.624,59.614
  Bottom Layer w0.254: TP8.1@19,55.125 19.6,55.725 J8.4@22.1,55.725
TX: Q18.2 R68.2 U1.45 | length 84.4
  Top Layer w0.254: U1.45@40.695,63.15 41.595,64.05 v1(41.595,64.85) ; v1(50.4,53.5) 53.3,50.6 105.2,50.6 107.6,48.2 R68.2@107.6,44.025 107.473,44.153 Q18.2@105.716,44.153
  Bottom Layer w0.254: v1(41.595,64.85) 43.187,64.85 48.2,59.836 48.2,54.2 48.9,53.5 v1(50.4,53.5)
TX1: D9.1 J2.2 R106.1 TP19.1 | length 56.9
  Top Layer w0.4: v1(67.025,19.275) 68,18.3 69.4,18.3 75.3,24.2 v1(78.5,24.2)
  Top Layer w0.5: v1(108.6,27.775) R106.1@108.6,28.775
  Bottom Layer w0.4: TP19.1@65.9,17.875 66.95,17.875 ; D9.1@66.9,20.5 67.025,20.375 v1(67.025,19.275) J2.2@67.025,11.595
  Bottom Layer w0.5: v1(78.5,24.2) 94.6,24.2 96.8,26.4 107.1,26.4 108.475,27.775 v1(108.6,27.775)
TX+: D16.1 J3.9 R90.2 TP16.1 | length 20.6
  Top Layer w0.4: J3.9@97.65,3.9 97.65,7.925 v1(104.2,14.475)
  Top Layer w0.5: v1(104.2,14.475) R90.2@105.2,15.475
  Bottom Layer w0.5: D16.1@101.3,11.4 101.3,11.575 v1(104.2,14.475) ; TP16.1@102.8,15.4 103.953,14.247
TX-: D15.1 J3.10 R91.2 TP14.1 | length 21.5
  Top Layer w0.4: J3.10@98.3,3.9 98.3,6.575 v1(106.2,14.475)
  Top Layer w0.5: v1(106.2,14.475) R91.2@107.2,15.475
  Bottom Layer w0.5: D15.1@103.3,11.4 106.2,14.3 v1(106.2,14.475) TP14.1@106.2,16.475
TXD: JPG2.2 Q20.2 R69.2 U11.8 | length 12.4
  Top Layer w0.254: U11.8@105.3,33.875 108.33,33.875 JPG2.2@108.6,33.605 108.6,39.6 108.375,39.825 R69.2@107.6,39.825 107.473,39.953 Q20.2@105.716,39.953
"UART MUXER": U1.30 U11.1 | length 87.8
  Top Layer w0.254: U1.30@44.231,56.786 51.417,49.6 93.8,49.6 v1(94.2,49.2) ; U11.1@105.3,29.325 106.5,29.325 v1(107.5,28.325)
  Bottom Layer w0.254: v1(94.2,49.2) 101.6,49.2 107.7,43.1 107.7,37.5 106.1,35.9 106.1,31.8 107.5,30.4 v1(107.5,28.325)
"V CHARGER": C24.1 C25.1 C26.1 J3.1 J3.2 K1.7 Q4.2 Q6.2 Q8.2 R27.2 R33.2 R39.2 TP23.1 | length 75.7
  Top Layer w0.254: 78.316,11.716 v1(79.947,11.716) Q4.2@80.947,11.716 81.075,11.843 R27.2@81.075,13.8 C24.1@81.075,16 ; v1(84.948,11.716) Q6.2@85.948,11.716 86.075,11.843 R33.2@86.075,13.8 C25.1@86.075,16 ; v1(89.948,11.716) Q8.2@90.948,11.716 91.075,11.843 R39.2@91.075,13.8 C26.1@91.075,16
  Top Layer w1: K1.7@55.62,19.38 55.62,17.18 56.8,16 76.2,16 78.3,13.9 78.3,6 80.4,3.9 J3.1@89,3.9 89.397,3.9
  Bottom Layer w0.5: v1(79.947,11.716) v1(84.948,11.716) v1(89.948,11.716)
  Bottom Layer w1: K1.7@55.62,19.38 TP23.1@55.62,21.38
VDD_X: C46.2 C47.2 R81.2 U7.16 U7.32 | length 21
  Top Layer w0.254: v1(54.013,73.29) U7.16@55.013,73.29 ; v1(56.6,76.675) C46.2@56.6,77.675 ; U7.32@58.513,68.31 58.513,67.587 58.79,67.31 v1(59.513,67.31)
  Top Layer w0.5: R81.2@52.6,77.675 C47.2@54.6,77.675 C46.2@56.6,77.675
  Bottom Layer w0.254: v1(54.013,73.29) 56.59,73.29 ; v1(56.6,76.675) 56.6,73.29 56.6,70.223 v1(59.513,67.31)
VPC_GATE: R44.1 U1.20 | length 30.7
  Top Layer w0.254: U1.20@40.695,53.25 46.773,47.173 46.773,42.527 48.8,40.5 v1(61.9,40.5)
  Bottom Layer w0.254: v1(61.9,40.5) 62.275,40.5 R44.1@63.075,39.7
VPD_GATE: R53.1 U1.19 | length 19.7
  Top Layer w0.254: U1.19@40.342,52.897 46.3,46.938 46.3,38.925 v1(45,37.625)
  Bottom Layer w0.254: R53.1@44,36.625 v1(45,37.625)
pads on no net: J1.0@26.832,80.55 J1.0@31.232,80.55 J1.2 J2.0 J2.6 J3. K1.2 K1.5 K1.6 K1.9 K2.2 K2.5 K2.6 K2.7 K2.8 K2.9 K3.2 K3.5 K3.6 K3.9 K4.2 K4.5 K4.6 K4.9 U1.6 U1.7 U1.8 U1.10 U1.13 U1.31 U1.37 U1.41 U1.47 U1.48 U1.54 U1.55 U3.7 U3.48 U7.17 U7.18 U7.19 U7.20 U7.22 U9.33 U10.33 U11.6 U11.7 U11.10 U11.11 U11.48

## Polygon pours and split planes (outlines as drawn)
GND on Bottom Layer "TopLayer-No Net" (solid, pour order 1000): 71.5,57.5 55.5,57.5 52.5,60.5 50,63 50,74.5 48,76.5 39,76.5 37,78.5 37,82 35,84 34.5,84.5 30.5,84.5 11.5,84.5 1,74 1,48.5 4,45.5 7.5,45.5 9,44 9,37 7.5,35.5 4,35.5 1,32.5 1,11 11,1 54.5,1 56.5,3 56.5,5 55.5,6 19.5,6 17,8.5 17,16.5 15.5,18 14,18 12.5,19.5 12.5,30.5 14,32 27,32 30,29 37,29 40,32 40,34 39,35 22,35 17.5,39.5 17.5,44.5 16,46 11.5,46 7.5,50 7.5,68 9,69.5 12.5,69.5 13.9,68.1 14,68 14,64 14,62.5 15.5,61 22.5,61 24,59.5 24,54.5 25.5,53 30.5,53 35,57.5 38.5,61 38.5,66.5 42.5,70.5 47.5,70.5 48.5,69.5 48.5,62 50,60.5 50,55.5 51.5,54 51.5,52 50,50.5 50,48.2 50,44.5 51.5,43 68,43 72,47 76,47 77,47 79,45 101,45 102,46 102,47.5 101,48.5 93.5,48.5 92.5,49.5 92.5,50 93.5,51 101,51 106,46 106.5,45.5 107.6,45.5 108.5,46.4 108.5,48 108.5,51.5 107,53 76,53 71.5,57.5
GND on Bottom Layer "TopLayer-No Net" (solid, pour order 1001): 94.5,13 78.4,13 76,15.4 76,19.5 79.5,23 96,23 98.5,25.5 108,25.5 109.5,24 110.5,23 111.5,23 112.5,24 112.5,33 109,36.5 109,43 106,46 106,53 120,53 121,52 121,46.5 120,45.5 116,45.5 113,42.5 113,39 116,36 120,36 121,35 121,11 111,1 104,1 103,2 103,6.5 104.5,8 104.5,10.5 104.5,11.5 108.5,15.5 108.5,18 107.5,19 106.7,19 98.5,19 97.5,18 96,16.5 96,14.5
GND on Bottom Layer "TopLayer-No Net" (solid, pour order 1002): 34,84.1 76.1,84.1 77.5,82.7 77.5,52.6 78,52.1 67.6,52.1 67.5,52.2 67.5,67.2 72.2,71.9 72.25,71.95 73.8,73.5 73.8,75.9 69.5,80.2 51.5,80.2 50,78.7 50,73.2 41.5,73.2 34,80.7
"PACK D-" on Top Layer "TopLayer-No Net" (solid, pour order 1003): 42.7,9.4 42.7,7.7 41.8,6.8 38.9,6.8 38.3,7.4 38.3,11.2 38.9,11.8 42.7,11.8
GND on Mid-Layer 2 "TopLayer-No Net" (solid, pour order 1005): 54.5,1 56.5,3 56.5,5 54.5,7 54.5,13.5 54.5,15.5 52.5,17.5 46,17.5 44.5,19 44.5,39 46,40.5 71,40.5 73,38.5 73,22.5 79.9,15.6 82.5,13 87,13 103,13 104.5,11.5 104.5,8 103,6.5 103,2.1 104.1,1 111,1 121,11 121,35 120,36 116,36 113,39 113,42.5 116,45.5 120,45.5 121,46.5 121,52 120,53 79,53 60,53 50,63 50,82.9 48.5,84.4 11.4,84.4 9.9,82.9 1,74 1,70.3 1,48.5 4,45.5 7.5,45.5 9,44 20.5,32.5 20.5,18 19,16.5 18,16.5 2.5,16.5 1,15 1,11 11,1 54.5,1
GND on Mid-Layer 1 "TopLayer-No Net" (solid, pour order 1004): 54.5,1 56.5,3 56.5,5 54.5,7 54.5,13.5 54.5,15.5 52.5,17.5 46,17.5 44.5,19 44.5,39 46,40.5 71,40.5 73,38.5 73,22.5 79.9,15.6 82.5,13 87,13 103,13 104.5,11.5 104.5,8 103,6.5 103,2.1 104.1,1 111,1 121,11 121,35 120,36 116,36 113,39 113,42.5 116,45.5 120,45.5 121,46.5 121,52 120,53 79,53 60,53 50,63 50,82.9 48.5,84.4 11.4,84.4 9.9,82.9 1,74 1,70.3 1,48.5 4,45.5 7.5,45.5 9,44 20.5,32.5 20.5,18 19,16.5 18,16.5 2.5,16.5 1,15 1,11 11,1 54.5,1

## Silkscreen, mask and mechanical layers (free items; w line width, h text height)
Top Overlay:
  lines w1: 8.9,30.5 12.9,30.5 ; 48,21.2 48,25.2 ; 48,32.9 48,36.9 ; 64.8,37.8 68.8,37.8
  text "MINI USB 2.0" at 35.6,83.8 h0.7
  text "RCSS_V3.0" at 22.4,81.4 h2 r180
  text "GND" at 24.7,75.1 h0.7 r270
  text "ID" at 26.7,75.1 h0.7 r270
  text "D+" at 28.7,75.1 h0.7 r270
  text "D-" at 30.7,75.1 h0.7 r270
  text "5V" at 32.7,75.1 h0.7 r270
  text "TEST" at 23.7,59.2 h0.7
  text "TDO" at 23.7,57.9 h0.7
  text "TDI" at 23.7,56.7 h0.7
  text "TMS" at 23.7,55.5 h0.7
  text "TCK" at 23.7,54.2 h0.7
  text "RST" at 23.7,52.9 h0.7
  text "GND" at 23.7,51.7 h0.7
  text "3V3" at 23.7,49.7 h0.7
  text "JTAG P=1.25" at 18.1,47.8 h0.7
  text "C" at 66,36.7 h2 r270
  text "D" at 49.1,33.7 h2
  text "24V" at 80,29.5 h0.7 r90
  text "36V" at 85,29.5 h0.7 r90
  text "48V" at 90,29.5 h0.7 r90
  text "E" at 16.3,23.9 h0.7
  text "LV" at 49.1,22.4 h2
  text "C" at 16.3,21.3 h0.7
  text "B" at 16.3,18.8 h0.7
  text "PACK C+" at 64.3,16.7 h0.7 r90
  text "1W C" at 66.3,16.7 h0.7 r90
  text "PACK C-" at 68.3,16.7 h0.7 r90
  text "NC" at 70.3,16.7 h0.7 r90
  text "1W D" at 72.3,16.7 h0.7 r90
  text "PACK D+" at 65.3,14.7 h0.7 r90
  text "TX" at 67.3,14.7 h0.7 r90
  text "RX" at 69.3,14.7 h0.7 r90
  text "PACK D-" at 71.3,14.7 h0.7 r90
  text "NG" at 20.3,12.8 h0.7
  text "OK" at 27.3,12.8 h0.7
  text "GND" at 88.5,6.3 h0.7 r90
  text "GND" at 90.5,6.3 h0.7 r90
  text "ID" at 92.5,6.3 h0.7 r90
  text "5V" at 94.5,6.3 h0.7 r90
  text "RX+" at 96.5,6.3 h0.7 r90
  text "RX-" at 98.5,6.3 h0.7 r90
  text "TX+" at 100.5,6.3 h0.7 r90
  text "TX-" at 102.5,6.3 h0.7 r90
  text "V_CHG" at 84.5,5.3 h0.7 r90
  text "V_CHG" at 86.5,5.3 h0.7 r90
  text "USB 3.0 A" at 52.6,1.6 h0.7
  text "MICRO_B USB 3.0" at 101.4,0.6 h0.7
Top Solder:
  lines w0.254: 58.513,73.29 58.513,73.913 59.4,74.8 70.2,74.8 ; 59.265,71.019 65.394,71.019 65.975,71.6 ; 59.265,72.019 64.781,72.019 ; 59.265,72.519 60.319,72.519 61.4,73.6 65.975,73.6 65.975,72.725 66.1,72.6 69.2,72.6 69.975,71.825 ; 70.2,74.9 72.625,77.325 72.625,77.9
  lines w0.4: 71.7,71.5 72.285,70.915 77.2,70.915
  lines w0.5: 65.975,75.9 67,75.9 ; 66.95,75.9 66.95,77.9 ; 67.625,71.6 69.015,70.21 69.015,67.9 ; 67.625,73.6 68.8,73.6 69.975,73.6 ; 68.625,77.9 68.625,79.75 68.975,80.1 ; 68.65,75.9 68.65,77.9 ; 70.625,80.1 72.975,80.1 ; 70.975,76.9 70.975,77.875 ; 71.3,67.9 71.625,68.225 71.625,71.6 71.625,73.6 ; 72.625,77.9 74.975,77.9 ; 72.975,74.9 72.975,75.825 ; 73.8,72.925 76.925,72.925 ; 74.625,75.9 76.525,75.9 ; 74.625,80.1 76.975,80.1 76.975,78.25 76.625,77.9 76.625,73.775 77.2,73.2 ; 67,75.9 67,75.9
  lines w1: 78.625,80.1 78.625,81.409 cw(c81.216,81.409) 81.216,84 111.5,84 120.5,75 120.5,57.5 118.5,55.5 83.5,55.5 81.5,57.5 81.5,80.5 83,82 111,82 118,75 118.5,74.5 118.5,58.5 117.5,57.5 84.5,57.5 83.5,58.5 83.5,80
Bottom Solder:
  lines w1: 79.5,78.5 79.5,59.5 80,59 83.5,55.5 116.4,55.5 118.5,55.5 120.5,57.5 120.5,75 111.5,84 85,84 81.5,80.5 81.5,60.5 84.5,57.5 117.5,57.5 118.5,58.5 118.5,74.5 111,82 85.5,82 83.5,80
Mechanical 1:
  drawing of 2395 lines, arcs and shapes, not listed
Mechanical 2:
  circle w0.127: c111,74.2 r1.75
Drill Drawing:
  text ".Legend" at -7.4,92.1 h2
Mechanical 32:
  lines w0.127: -47.03,-103.98 -47.03,-87.98 -25.83,-87.98 -25.83,-103.98 -47.03,-103.98

## Text inside footprints (layer, text, board x,y; h text height)
D1: Top Overlay "+" at 22.955,6.689 h1.5 r90
D2: Top Overlay "+" at 29.955,6.689 h1.5 r90
D3: Bottom Overlay "-" at 44.329,6.038 h0.8
D4: Bottom Overlay "-" at 45.871,12.862 h0.8 r180
D5: Top Overlay "-" at 52.871,9.438 h0.8
D6: Bottom Overlay "-" at 28.929,17.838 h0.8
D7: Bottom Overlay "-" at 26.929,17.838 h0.8
D8: Top Overlay "-" at 44.75,19.155 h0.8 r90
D9: Bottom Overlay "-" at 67.129,19.238 h0.8
D10: Bottom Overlay "-" at 69.029,19.238 h0.8
D11: Bottom Overlay "-" at 71.029,19.238 h0.8
D12: Bottom Overlay "-" at 65.129,19.238 h0.8
D13: Bottom Overlay "-" at 99.071,12.662 h0.8 r180
D14: Bottom Overlay "-" at 97.071,12.662 h0.8 r180
D15: Bottom Overlay "-" at 103.071,12.662 h0.8 r180
D16: Bottom Overlay "-" at 101.071,12.662 h0.8 r180
D17: Bottom Overlay "-" at 64.971,39.062 h0.8 r180
D18: Bottom Overlay "-" at 46.738,32.971 h0.8 r270
D19: Top Overlay "-" at 12.538,34.929 h0.8 r270
D20: Bottom Overlay "-" at 75.029,19.238 h0.8
J2: Drill Drawing "0.7X1.8mm" at 59.102,7.602 h0.8; Drill Drawing "0.7X1.8mm" at 71.903,7.602 h0.8; Drill Drawing "0.8X2.6mm" at 59.026,0.287 h0.8; Drill Drawing "0.8X2.6mm" at 74.748,0.287 h0.8
J8: Top Overlay "1" at 23.599,60.653 h1 r270